# Altium PCB BoosterPack.PcbDoc
Units mil, origin at the board's own origin, x right, y up, seen from the top; angles counter-clockwise.
Board outline 2310.03 x 2910.03 mil, 2 copper layers (Top Layer, Bottom Layer); 12 components, 49 nets, 99 pads, 0 vias.
Unrouted connection lines stored in the file: 43.
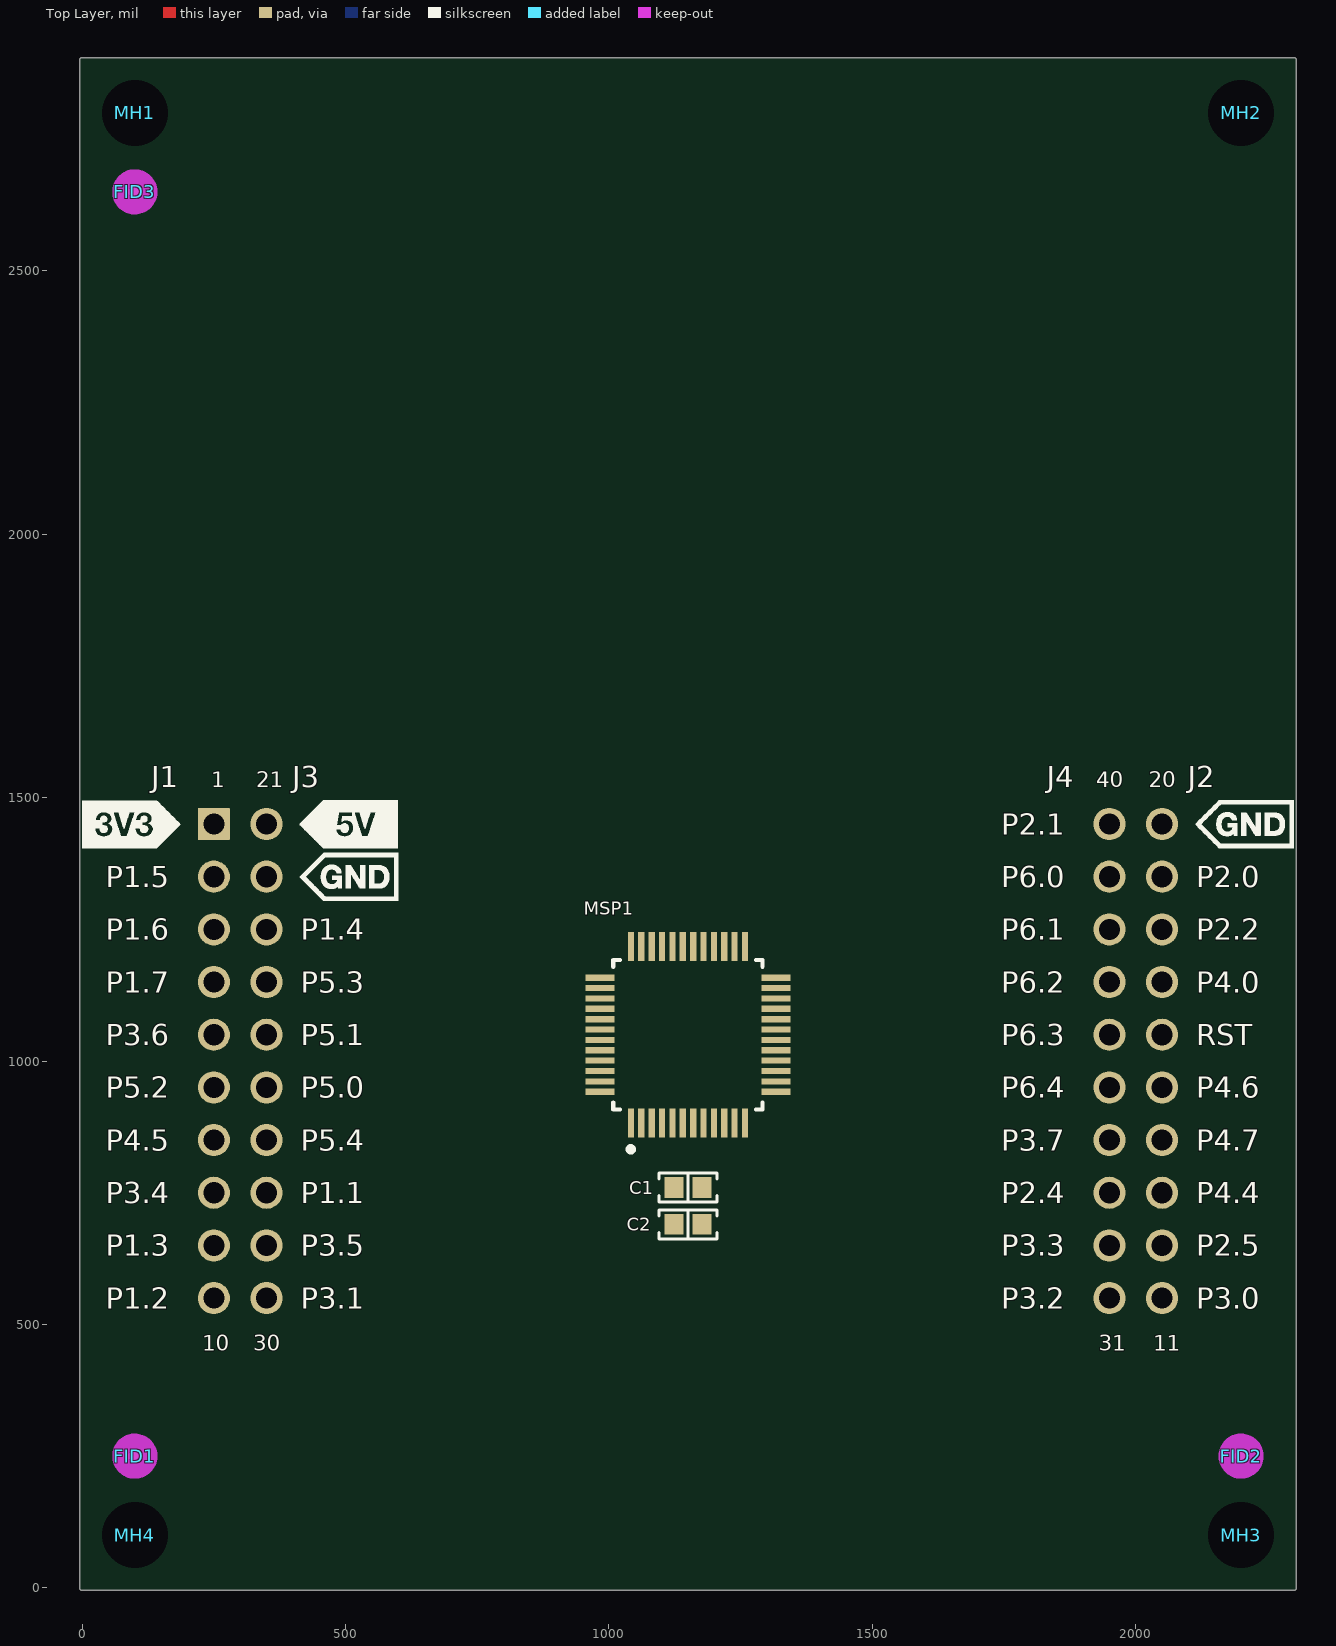
[diagram p0: Top Layer view]
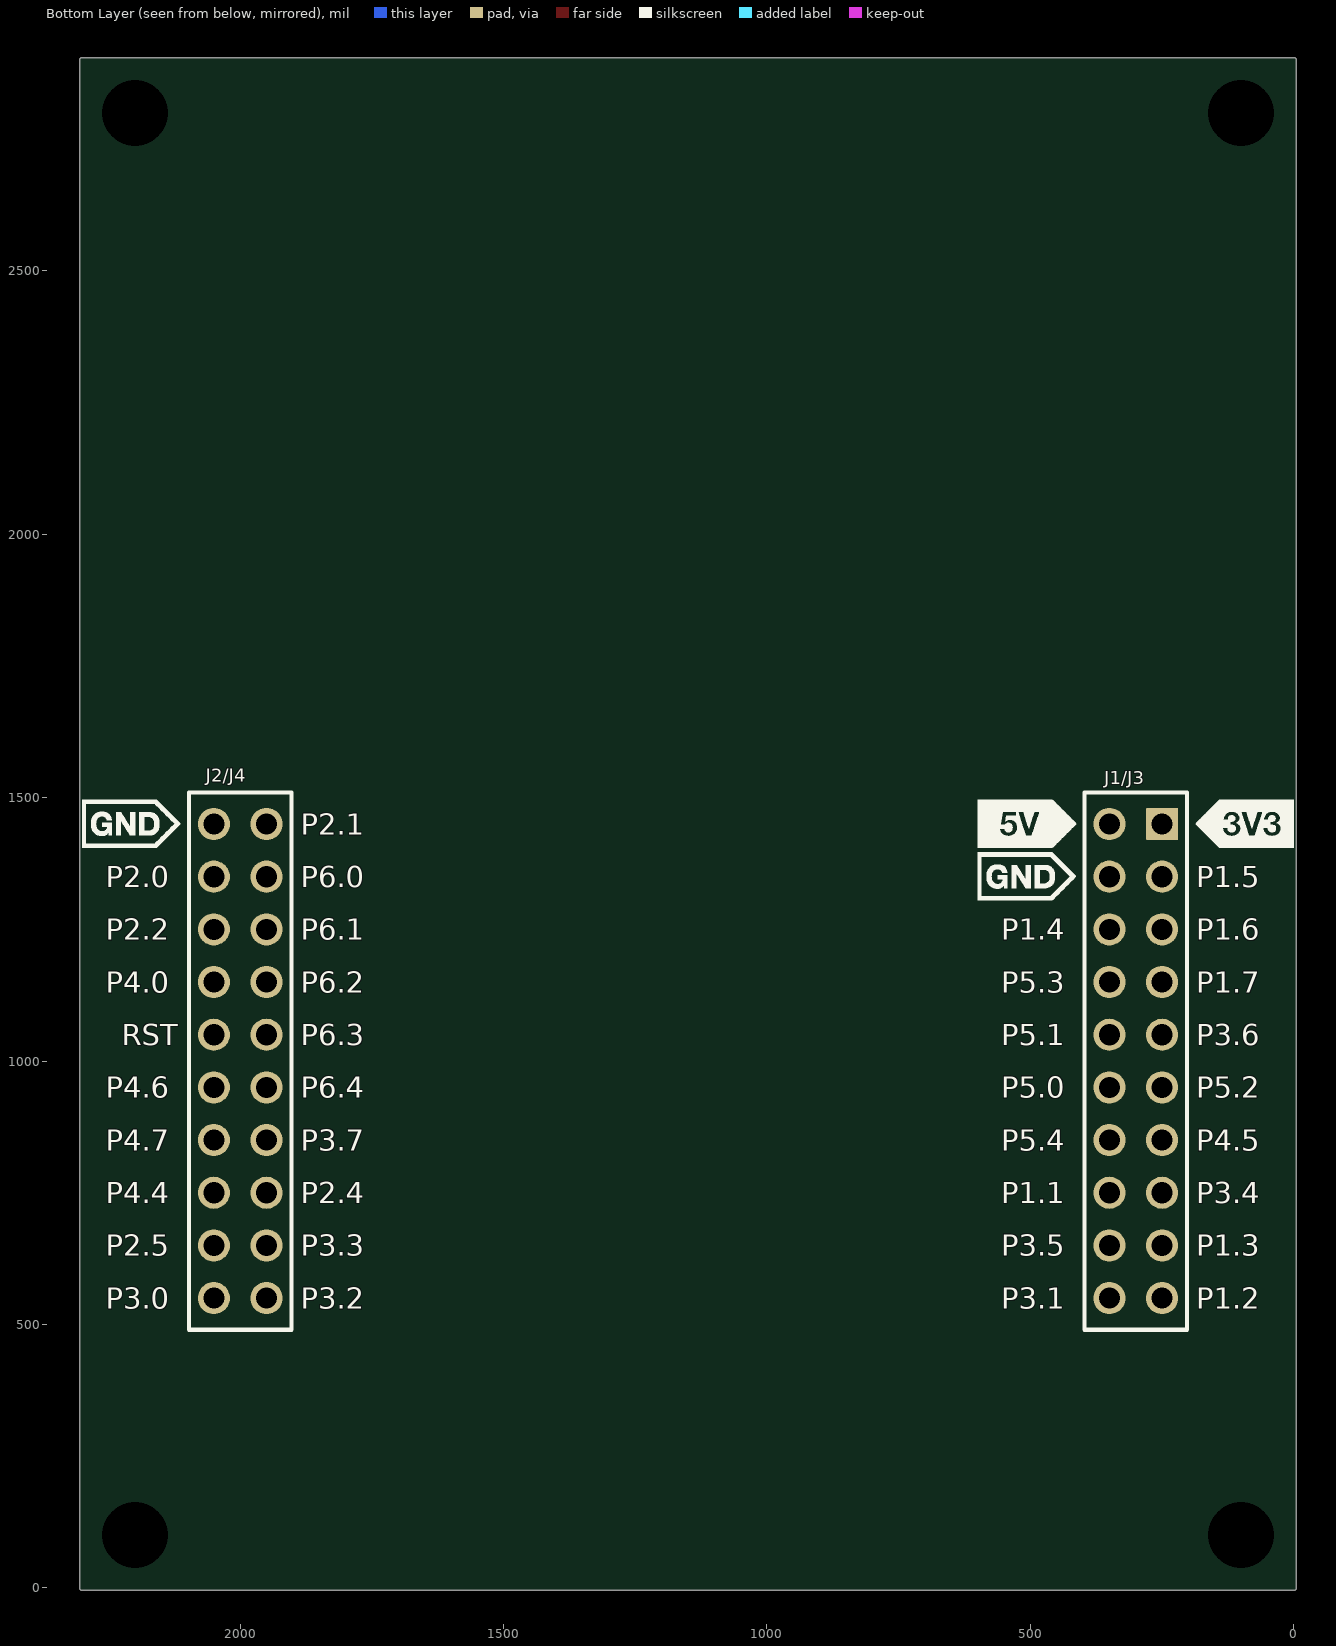
[diagram p1: Bottom Layer view, seen from below]

## Layer stack, top to bottom
Top Solder: solder mask 0.4, Solder Resist, Dk 3.5
Top Layer: signal copper 1.4
Dielectric 1: core 12.6, FR-4, Dk 4.8
Bottom Layer: signal copper 1.4
Bottom Solder: solder mask 0.4, Solder Resist, Dk 3.5

## Board outline
0,-5.01 cw(c0,0) -5.01,0 -5.01,1500 -5.02,1476 -5.01,2900 cw(c0,2900) 0,2905.02 2300,2905.02 cw(c2300,2900) 2305.01,2900 2305.01,1500.03 2305.01,1494.25 2305.01,1500 2305.01,0 cw(c2300,0) 2300,-5.01

## Design rules (kind name [scope] priority, off if disabled: settings)
AcuteAngle [All] p1: minimum=4.50000000000000E+0001 checktracksonly=FALSE
AssemblyTestPointUsage [All] p1: valid=2
BoardOutlineClearance BoardOutlineClearance_MountingHoles [OnCopper and InComponentClass('Mounting Holes')] p1: gap=15 ignorepadtopadclearanceinfootprint=FALSE
BoardOutlineClearance BoardOutlineClearance_Poly [OnCopper and IsPoly] p2: gap=15 ignorepadtopadclearanceinfootprint=FALSE
BoardOutlineClearance [OnCopper and Not InComponentClass('Logo') and not InComponentClass('FiducialMark') and not InRegion(1000,500,4000,800) and not InPoly] p3: gap=10 ignorepadtopadclearanceinfootprint=FALSE
Clearance Clearance_FiducialMark [IsKeepOut and InComponentClass('FiducialMark') vs IsPad and InComponentClass('FiducialMark')] p1: gap=0 ignorepadtopadclearanceinfootprint=FALSE
Clearance "Fiducial Clearance" [InComponentClass('FiducialMark')] p2: gap=10 ignorepadtopadclearanceinfootprint=FALSE except(0: Arc-Hole Track-Hole SMDPad-Hole THPad-Hole Via-Hole Fill-Hole Poly-Hole Region-Hole Text-Hole)
Clearance Clearance_Keepouts [((IsTrack Or IsArc) And Not InPoly) And IsFree and IsKeepOut vs ((IsTrack Or IsArc) And Not InPoly) And IsFree and IsKeepOut] p3: gap=0 ignorepadtopadclearanceinfootprint=FALSE
Clearance Clearance_Poly [InPolygon] p4: gap=12 ignorepadtopadclearanceinfootprint=FALSE except(0: Arc-Hole Track-Hole SMDPad-Hole THPad-Hole Via-Hole Fill-Hole Poly-Hole Region-Hole Text-Hole)
Clearance [All] p5: gap=7.87 ignorepadtopadclearanceinfootprint=FALSE except(0: Arc-Hole Track-Hole SMDPad-Hole THPad-Hole Via-Hole Fill-Hole Poly-Hole Region-Hole Text-Hole)
ComponentClearance ComponentClearance_Standoffs [HasFootprint('KY_MAE-10') vs HasFootprint('NPTH125mil')] p1: gap=0 collisioncheckmode=3 verticalgap=0 showdistances=FALSE
ComponentClearance ComponentClearance_2PinHeaders [HasFootprint('TSW-102-07-G-S') vs HasFootprint('TSW-102-07-G-S')] p2: gap=0 collisioncheckmode=3 verticalgap=0 showdistances=FALSE
ComponentClearance ComponentClearance_TestPoint [HasFootprint('Keystone5001') vs HasFootprint('Keystone5001')] p3: gap=1 collisioncheckmode=3 verticalgap=10 showdistances=FALSE
ComponentClearance ComponentClearance_MountingHoles_FiducialMarks [InComponentClass('Mounting Holes') vs InComponentClass('FiducialMark')] p4: gap=10 collisioncheckmode=3 verticalgap=10 showdistances=FALSE
ComponentClearance ComponentClearance_ShuntToShunt [InComponentClass('Shunt') vs InComponentClass('Shunt')] p5: gap=0 collisioncheckmode=3 verticalgap=0 showdistances=FALSE
ComponentClearance ComponentClearance_Shunt [InComponentClass('Header') vs InComponentClass('Shunt')] p6: gap=0 collisioncheckmode=3 verticalgap=0 showdistances=FALSE
ComponentClearance ComponentClearance_Logo [InComponentClass('Logo')] p7: gap=5 collisioncheckmode=3 verticalgap=10 showdistances=FALSE
ComponentClearance ComponentClearance_ScrewToNut [(HasFootprint('NY PMS 440 0025 PH')) vs (HasFootprint('Keystone_1902C'))] p8: gap=5 collisioncheckmode=3 verticalgap=10 showdistances=FALSE
ComponentClearance ComponentClearance_MountingHoles [InComponentClass('Mounting Holes')] p9: gap=250 collisioncheckmode=3 verticalgap=100000 showdistances=FALSE
ComponentClearance ComponentClearance_SmallPassives [HasFootprint('0201*') or HasFootprint('0402*') or HasFootprint('0508') or HasFootprint('0603*') or HasFootprint('0612') or HasFootprint('0805*') or HasFootprint('0815*') or HasFootprint('0830*') or HasFootprint('1206*') or HasFootprint('1210*') or HasFootprint('1808*') or HasFootprint('1812*') or HasFootprint('1825*') or HasFootprint('2010*') or HasFootprint('2220*') or HasFootprint('2225*') or HasFootprint('2512*') or HasFootprint('2728*') or HasFootprint('3518*') vs HasFootprint('0201*') or HasFootprint('0402*') or HasFootprint('0508') or HasFootprint('0603*') or HasFootprint('0612') or HasFootprint('0805*') or HasFootprint('0815*') or HasFootprint('0830*') or HasFootprint('1206*') or HasFootprint('1210*') or HasFootprint('1808*') or HasFootprint('1812*') or HasFootprint('1825*') or HasFootprint('2010*') or HasFootprint('2220*') or HasFootprint('2225*') or HasFootprint('2512*') or HasFootprint('2728*') or HasFootprint('3518*')] p10: gap=5 collisioncheckmode=3 verticalgap=0 showdistances=FALSE
ComponentClearance ComponentClearance_THtoSMT [IsThruComponent vs IsSMTComponent] p11: gap=10 collisioncheckmode=3 verticalgap=0 showdistances=FALSE
ComponentClearance ComponentClearance_THtoTH [IsThruComponent vs IsThruComponent] p12: gap=15 collisioncheckmode=3 verticalgap=0 showdistances=FALSE
ComponentClearance [All] p13: gap=15 collisioncheckmode=3 verticalgap=0 showdistances=FALSE
DiffPairsRouting [All] p1: maxlimit=100 minlimit=10 mostfreqgap=10 toplayer_minwidth=15 toplayer_maxwidth=15 toplayer_prefwidth=15 bottomlayer_minwidth=15 bottomlayer_maxwidth=15 bottomlayer_prefwidth=15 maxuncoupledlength=1000
FabricationTestPointUsage TestPointUsage [All] p1: valid=2 allowmultiple=FALSE
FabricationTestpoint Testpoint [All] p1: side=3 testpointundercomponent=TRUE minsize=40 maxsize=100 preferedsize=60 minholesize=0 maxholesize=40 preferedholesize=32 testpointgrid=1 allowsidetop=TRUE allowsidebottom=TRUE usegrid=TRUE gridtolerance=0.01
FanoutControl Fanout_LCC [IsLCC] p1: bgadir=Out bgaviamode=Centered fanoutstyle=Auto fanoutdirection=Alternating viagrid=1 // Fanout_LCC (Default Rule)
FanoutControl Fanout_BGA [IsBGA] p2: bgadir=Out bgaviamode=Centered fanoutstyle=Auto fanoutdirection=Alternating viagrid=1 // Fanout_BGA (Default Rule)
FanoutControl Fanout_Default [All] p4: bgadir=Out bgaviamode=Centered fanoutstyle=Auto fanoutdirection=Alternating viagrid=1 // Fanout_Default (Default Rule)
FanoutControl Fanout_Small [(CompPinCount < 5)] p5: bgadir=Out bgaviamode=Centered fanoutstyle=Auto fanoutdirection=OutThenIn viagrid=1 // Fanout_Small (Default Rule)
HoleSize [All] p1: absolutevalues=TRUE maxlimit=251 minlimit=12 maxpercent=80.000 minpercent=20.000
MinimumAnnularRing MinimumAnnularRing_ThermalPadVias [IsVia and InAnyComponent] p1: minimumring=5.91
MinimumAnnularRing [All] p2: minimumring=8
MinimumSolderMaskSliver [All] p1: minsoldermaskwidth=3.94
PlaneClearance [All] p1: clearance=10
PlaneConnect [All] p1: planeconnectstyle=Relief reliefexpansion=10 reliefentries=4 reliefconductorwidth=10 reliefairgap=10
PolygonConnect [All] p1: connectstyle=Direct reliefconductorwidth=10 reliefentries=4 polygonreliefangle="90 Angle" airgapwidth=10
RoomDefinition "MSP430 Main" [InComponentClass('MSP430 Main')] p1: confinementstyle=ConfineIn formatcopy=TRUE lockcomponents=FALSE outline -295,-305 2570,-305 2570,3035 -295,3035
RoutingVias ThermalPadVias [IsVia and InAnyComponent] p1: holewidth=7.87 width=19.68 viastyle="Through Hole" minholewidth=7.87 minwidth=19.68 maxholewidth=16 maxwidth=30
RoutingVias [All] p2: holewidth=12 width=28 viastyle="Through Hole" minholewidth=7.87 minwidth=26 maxholewidth=40 maxwidth=65
SilkToBoardRegionClearance [Not ((IsComment or IsDesignator) And (Hide <> 'False')) and not InRegion(1000,500,4000,800)] p1:
SilkToSilkClearance SilkToSilkClearance_Pb-FreeLogo [(HasFootprint('Pb-Free_Overlay_Medium') OR HasFootprint('Pb-Free_Overlay_Small')) vs (HasFootprint('Pb-Free_Overlay_Medium') OR HasFootprint('Pb-Free_Overlay_Small'))] p1: silktosilkclearance=0
SilkToSilkClearance [All] p2: silktosilkclearance=3
SilkToSolderMaskClearance SilkToComponentPadClearance [(IsPad or IsFill or IsRegion) and InAnycomponent] p1: minsilkscreentomaskgap=3 clearancetoexposedcopper=TRUE
SilkToSolderMaskClearance "Silk to Solder Mask Opening" [All] p2: minsilkscreentomaskgap=3 clearancetoexposedcopper=FALSE
SolderMaskExpansion SolderMaskExpansion_via [isvia] p1: expansion=-17 istentingtop=FALSE
SolderMaskExpansion [All] p2: expansion=1.97 istentingtop=FALSE
Width [All] p1: maxlimit=100 minlimit=6 preferedwidth=10 checkconnectedcopper=TRUE
14 further rules are at their usual default settings.

## Classes and differential pairs
component class FiducialMark: FID1 FID2 FID3

## Components (designator, comment, footprint, x,y, rotation, side; value= is the part's Value field where it differs from the comment)
C1 "100.0 nF" "PCB - CAPACITOR - MLCC - CAP 0603_1608" 1150,760 r180 top locked
C2 "10.0 µF" "PCB - CAPACITOR - MLCC - CAP 0603_1608" 1150,690 r180 top locked
FID1 "Fiducial" Fiducial6.4-20 100,250 r0 top locked
FID2 "Fiducial" Fiducial6.4-20 2200,250 r0 top locked
FID3 "Fiducial" Fiducial6.4-20 100,2650 r0 top
J1/J3 "SSQ-110-03-T-D" BoosterPack_40pin_J1J3 300,1000 r180 bottom locked
J2/J4 "SSQ-110-03-T-D" BoosterPack_40pin_J2J4 2000,1000 r180 bottom locked
MH1 "MTG_NoPads" NPTH125mil 100,2800 r0 top locked
MH2 "MTG_NoPads" NPTH125mil 2200,2800 r0 top locked
MH3 "MTG_NoPads" NPTH125mil 2200,100 r0 top locked
MH4 "MTG_NoPads" NPTH125mil 100,100 r0 top locked
MSP1 "MSP430FR2355TPTR" FP-PT0048A-MFG 1150,1050 r90 top locked

## Footprints (in the part's own frame and the unit in brackets; to place one, negate y for a bottom-side part, rotate by r counter-clockwise, add the part's x,y. Pads: shape width x height; smd on the part's side, far side on the other; paste and mask are expansions set on the pad)
BoosterPack_40pin_J1J3 [mm] "Receptacle, 2.54mm, 10x2, TH"
  rrect6% 1.55x1.55 hole 1.02: 1(1.27,11.43)
  round 1.55 hole 1.02: 2(1.27,8.89) 3(1.27,6.35) 4(1.27,3.81) 5(1.27,1.27) 6(1.27,-1.27) 7(1.27,-3.81) 8(1.27,-6.35) 9(1.27,-8.89) 10(1.27,-11.43) 21(-1.27,11.43) 22(-1.27,8.89) 23(-1.27,6.35) 24(-1.27,3.81) 25(-1.27,1.27) 26(-1.27,-1.27) 27(-1.27,-3.81) 28(-1.27,-6.35) 29(-1.27,-8.89) 30(-1.27,-11.43)
  silkscreen extent -7.62,-12.95 7.62,12.95, body extent -2.48,-12.95 2.48,12.95, height 8.51
BoosterPack_40pin_J2J4 [mm] "Receptacle, 2.54mm, 10x2, TH"
  round 1.55 hole 1.02: 11(-1.27,-11.43) 12(-1.27,-8.89) 13(-1.27,-6.35) 14(-1.27,-3.81) 15(-1.27,-1.27) 16(-1.27,1.27) 17(-1.27,3.81) 18(-1.27,6.35) 19(-1.27,8.89) 20(-1.27,11.43) 31(1.27,-11.43) 32(1.27,-8.89) 33(1.27,-6.35) 34(1.27,-3.81) 35(1.27,-1.27) 36(1.27,1.27) 37(1.27,3.81) 38(1.27,6.35) 39(1.27,8.89) 40(1.27,11.43)
  silkscreen extent -7.62,-12.95 2.48,12.95, body extent -2.48,-12.95 2.48,12.95, height 8.51
Fiducial6.4-20 [mil]
  round 25 smd mask+26.87: 1(0,0)
  Top Layer keep-out circle w46.37: c0,0 r19.68
FP-PT0048A-MFG [mm] "Thin QFP, 48-Leads, Body 7x7mm, Pitch 0.5mm, IPC Medium Density"
  rect 1.4x0.3 smd paste-1000 mask+0: 1(-4.25,2.75) 2(-4.25,2.25) 3(-4.25,1.75) 4(-4.25,1.25) 5(-4.25,0.75) 6(-4.25,0.25) 7(-4.25,-0.25) 8(-4.25,-0.75) 9(-4.25,-1.25) 10(-4.25,-1.75) 11(-4.25,-2.25) 12(-4.25,-2.75) 25(4.25,-2.75) 26(4.25,-2.25) 27(4.25,-1.75) 28(4.25,-1.25) 29(4.25,-0.75) 30(4.25,-0.25) 31(4.25,0.25) 32(4.25,0.75) 33(4.25,1.25) 34(4.25,1.75) 35(4.25,2.25) 36(4.25,2.75)
  rect 0.3x1.4 smd paste-1000 mask+0: 13(-2.75,-4.25) 14(-2.25,-4.25) 15(-1.75,-4.25) 16(-1.25,-4.25) 17(-0.75,-4.25) 18(-0.25,-4.25) 19(0.25,-4.25) 20(0.75,-4.25) 21(1.25,-4.25) 22(1.75,-4.25) 23(2.25,-4.25) 24(2.75,-4.25) 37(2.75,4.25) 38(2.25,4.25) 39(1.75,4.25) 40(1.25,4.25) 41(0.75,4.25) 42(0.25,4.25) 43(-0.25,4.25) 44(-0.75,4.25) 45(-1.25,4.25) 46(-1.75,4.25) 47(-2.25,4.25) 48(-2.75,4.25)
  silkscreen extent -5.65,-3.6 3.6,3.6, body extent -5.05,-5.05 5.05,5.05, height 0.25
NPTH125mil [mil]
  round 120 hole 125 unplated mask+15: 1(0,0)
"PCB - CAPACITOR - MLCC - CAP 0603_1608" [mm] "Chip Capacitor, 2-Leads, Body 1.60x0.80mm, IPC Medium Density"
  rect 0.9x1 smd: 1(-0.675,0) 2(0.675,0)
  silkscreen extent -1.4,-0.7 1.4,0.7, body extent -0.8,-0.41 0.8,0.41, height 0.82

## Part data
C1: library part 1564, "0.1 µF ±5% 50V Ceramic Capacitor X7R 0603 (1608 Metric)", Manufacturer=YAGEO, Manufacturer Part Number=CC0603JRX7R9BB104, Package="0603 (1608 Metric)", Supplier Part Number 1=311-1779-2-ND, Tolerance="5.0 %", Voltage Rating="50.0 V", Capacitance="100.0 nF", Category=Capacitors, Composition=Ceramic, Datasheet=https://www.yageo.com/upload/media/product/productsearch/datasheet/mlcc/UPY-GPHC_X7R_6.3V-to-50V_20.pdf, Name="100.0 nF 50.0 V 5.0 % Ceramic Capacitor", Packaging="Tape & Reel (TR)", Rowan Part Number=1564, Status=Active, Supplier 1=Digi-Key
C2: library part 1572, "10 µF ±20% 16V Ceramic Capacitor X5R 0603 (1608 Metric)", Manufacturer=YAGEO, Manufacturer Part Number=CC0603MRX5R7BB106, Package="0603 (1608 Metric)", Supplier Part Number 1=311-1822-2-ND, Tolerance="20.0 %", Voltage Rating="16.0 V", Capacitance="10.0 µF", Category=Capacitors, Composition=Ceramic, Datasheet=https://www.yageo.com/upload/media/product/productsearch/datasheet/mlcc/UPY-GPHC_X5R_4V-to-50V_26.pdf, Name="10.0 µF 16.0 V 20.0 % Ceramic Capacitor", Packaging="Tape & Reel (TR)", Rowan Part Number=1572, Status=Active, Supplier 1=Digi-Key
FID1 FID2 FID3: "Fiducial mark.  There is nothing to buy or mount.", Manufacturer=N/A, ClassName=FiducialMark, CompType=Fiducial, LatestRevisionDate=2017-05-31, LatestRevisionNote="Added Alternate PartNumber and Alternate Manufacturer parameters to appropriate components.", MountType=N/A, PackageReference=N/A, PartNumber=N/A, Publisher="Texas Instruments", SymbolCreator=codlsc, SymbolVersion=2009-11-4
J1/J3: library part BoosterPack_40pin_J1J3, "Receptacle, 2.54mm, 10x2, Tin, TH", Alternate Manufacturer="Major League Electronics", Alternate PartNumber=CRD-081413-A-G, Manufacturer=Samtec, Supplier Part Number 1=SAM1204-10-ND, ComponentLink1Description="Datasheet Link", CompType=Receptacle, LatestRevisionDate=2017-02-01, MountType=TH, Note="Booster Pack 40 pin J1 and J3", PackageReference="10x2 Receptacle", PartNumber=SSQ-110-03-T-D, Publisher="Texas Instruments", RoHS=Y, Supplier 1=Digi-Key, SymbolCreator=a0412235, SymbolVersion=2015-10-21
J2/J4: library part BoosterPack_40pin_J2J4, "Receptacle, 2.54mm, 10x2, Tin, TH", Alternate Manufacturer="Major League Electronics", Alternate PartNumber=CRD-081413-A-G, Manufacturer=Samtec, Supplier Part Number 1=SAM1204-10-ND, ComponentLink1Description="Datasheet Link", CompType=Receptacle, LatestRevisionDate=2017-02-01, MountType=TH, Note="Booster Pack 40 pin J2 and J4", PackageReference="10x2 Receptacle", PartNumber=SSQ-110-03-T-D, Publisher="Texas Instruments", RoHS=Y, Supplier 1=Digi-Key, SymbolCreator=a0412235, SymbolVersion=2015-10-21
MH1 MH2 MH3 MH4: library part "Mounting Hole (non-standard) No Pad", "PCB Mounting Hole, No Pad", Manufacturer=Any, PartNumber=N/A, CompType="Mounting Hole", LatestRevisionDate=2017-01-25, MountType=N/A, PackageReference="Mounting Hole", Publisher="Texas Instruments", SymbolCreator=a0412235, SymbolVersion=2013-12-26
MSP1: library part CMP-04869-000010-1, "IC MCU 16BIT 32KB FRAM 48LQFP", Ambient Temperature Range High=+105°C, Ambient Temperature Range Low=-40°C, Frequency=24MHz, Manufacturer="Texas Instruments", Max Junction Temp=+115°C, Max Supply Voltage=3.6V, Min Supply Voltage=1.8V, Package=PT0048A, Temperature="-40°C to +105°C", Automotive=No, Category=IC, ComponentLink2Description=Datasheet, ComponentLink2URL=http://www.ti.com/lit/ds/symlink/msp430fr2355.pdf, Core Architecture=RISC, Data Bus Width=16bits, Device Class L1="Integrated Circuits (ICs)", Device Class L2="Embedded Processors and Controllers", Device Class L3=Microcontrollers, Digikey Description="IC MCU 16BIT 32KB FRAM 48LQFP", Footprint Url=http://www.ti.com/lit/ds/symlink/tl16c550c.pdf, Height=1.6mm, Interface=I2C,SPI,UART,USART,SCI,IrDA, Ipc Land Pattern Name=QFP50P900X900X160-48, Lead Free=Yes, Manufacturer Part Number=MSP430FR2355TPTR, Memory Size=32KBytes, Memory Type=OTHER, Number Of A/D Converters=1, Number Of Adc Channels=12, Number Of Cores=1, Number Of I2C Channels=2, Number Of I/Os=44, Number Of Spi Channels=4, Number Of Timers/Counters=4, Number Of Uart Channels=2, Octopart=https://octopart.com/msp430fr2355tptr-texas+instruments-92191342, Ram Size=4KBytes, RoHS=TRUE, Standoff Height=0.05mm, Temperature Range High=+105°C, Temperature Range Low=-40°C

## Nets (pads, with @x,y where several pads share a name; then routed paths per layer and width w, separated by ;. In a path a pad name is that pad's centre, name@x,y a point inside that pad or via, vN(x,y) a via of type N, cw(c..) or ccw(c..) an arc to the next point about the centre after c; other vN are vias at no path point)
+3V3: C1.2 C2.2 J1/J3.1 MSP1.6
+5: J1/J3.21
A0_RX: J1/J3.3 MSP1.32
A0_TX: J1/J3.4 MSP1.31
A1_SEEED: J1/J3.28 MSP1.2
A4_SEEED: J1/J3.23 MSP1.34
A5: J1/J3.2 MSP1.33
A8: J1/J3.26 MSP1.43
A9: J1/J3.25 MSP1.42
A10: J1/J3.6 MSP1.41
A11: J1/J3.24 MSP1.40
B0_SCL: J1/J3.9 MSP1.48
B0_SDA: J1/J3.10 MSP1.1
B1_CLK: J1/J3.7 MSP1.14
B1_CS: J2/J4.13 MSP1.15
B1_MISO: J2/J4.14 MSP1.12
B1_MOSI: J2/J4.15 MSP1.13
BCL_RXD: MSP1.24
BCL_TXD: MSP1.23
GND: C1.1 C2.1 J1/J3.22 J2/J4.20 MSP1.7
OA2+: J2/J4.32 MSP1.44
OA2-: J2/J4.31 MSP1.45
OA2O: J1/J3.30 MSP1.46
OA3O: J1/J3.29 MSP1.37
P1.0: MSP1.3
P2.0: J2/J4.19 MSP1.30
P2.1: J2/J4.40 MSP1.29
P2.2: J2/J4.18 MSP1.28
P2.3: MSP1.27
P2.4: J2/J4.33 MSP1.11
P2.5: J2/J4.12 MSP1.10
P2.6: MSP1.9
P2.7: MSP1.8
P3.0: J2/J4.11 MSP1.47
P3.4: J1/J3.8 MSP1.38
P3.6: J1/J3.5 MSP1.36
P3.7: J2/J4.34 MSP1.35
P4.0: J2/J4.17 MSP1.26
P4.1: MSP1.25
P5.4: J1/J3.27 MSP1.39
P6.0: J2/J4.39 MSP1.22
P6.1: J2/J4.38 MSP1.21
P6.2: J2/J4.37 MSP1.20
P6.3: J2/J4.36 MSP1.19
P6.4: J2/J4.35 MSP1.18
P6.5: MSP1.17
P6.6: MSP1.16
R\S\T\: J2/J4.16 MSP1.5
SBWTCK: MSP1.4
pads on no net: FID1.1 FID2.1 FID3.1 MH1.1 MH2.1 MH3.1 MH4.1

## Silkscreen, mask and mechanical layers (free items; w line width, h text height)
Top Overlay:
  text "P2.1" at 1745,1430 h40
  text "P1.5" at 45,1330 h40
  text "P6.0" at 1745,1330 h40
  text "P2.0" at 2115,1330 h40
  text "P1.6" at 45,1230 h40
  text "P1.4" at 415,1230 h40
  text "P6.1" at 1745,1230 h40
  text "P2.2" at 2115,1230 h40
  text "P1.7" at 45,1130 h40
  text "P5.3" at 415,1130 h40
  text "P6.2" at 1745,1130 h40
  text "P4.0" at 2115,1130 h40
  text "P3.6" at 45,1030 h40
  text "P5.1" at 415,1030 h40
  text "P6.3" at 1745,1030 h40
  text "RST" at 2115,1030 h40
  text "P5.2" at 45,930 h40
  text "P5.0" at 415,930 h40
  text "P6.4" at 1745,930 h40
  text "P4.6" at 2115,930 h40
  text "P4.5" at 45,830 h40
  text "P5.4" at 415,830 h40
  text "P3.7" at 1745,830 h40
  text "P4.7" at 2115,830 h40
  text "P3.4" at 45,730 h40
  text "P1.1" at 415,730 h40
  text "P2.4" at 1745,730 h40
  text "P4.4" at 2115,730 h40
  text "P1.3" at 45,630 h40
  text "P3.5" at 415,630 h40
  text "P3.3" at 1745,630 h40
  text "P2.5" at 2115,630 h40
  text "P1.2" at 45,530 h40
  text "P3.1" at 415,530 h40
  text "P3.2" at 1745,530 h40
  text "P3.0" at 2115,530 h40
Bottom Overlay:
  text "P2.1" at 1885,1430 h40
  text "P1.5" at 185,1330 h40
  text "P6.0" at 1885,1330 h40
  text "P2.0" at 2255,1330 h40
  text "P1.6" at 185,1230 h40
  text "P1.4" at 555,1230 h40
  text "P6.1" at 1885,1230 h40
  text "P2.2" at 2255,1230 h40
  text "P1.7" at 185,1130 h40
  text "P5.3" at 555,1130 h40
  text "P6.2" at 1885,1130 h40
  text "P4.0" at 2255,1130 h40
  text "P3.6" at 185,1030 h40
  text "P5.1" at 555,1030 h40
  text "P6.3" at 1885,1030 h40
  text "RST" at 2225,1030 h40
  text "P5.2" at 185,930 h40
  text "P5.0" at 555,930 h40
  text "P6.4" at 1885,930 h40
  text "P4.6" at 2255,930 h40
  text "P4.5" at 185,830 h40
  text "P5.4" at 555,830 h40
  text "P3.7" at 1885,830 h40
  text "P4.7" at 2255,830 h40
  text "P3.4" at 185,730 h40
  text "P1.1" at 555,730 h40
  text "P2.4" at 1885,730 h40
  text "P4.4" at 2255,730 h40
  text "P1.3" at 185,630 h40
  text "P3.5" at 555,630 h40
  text "P3.3" at 1885,630 h40
  text "P2.5" at 2255,630 h40
  text "P1.2" at 185,530 h40
  text "P3.1" at 555,530 h40
  text "P3.2" at 1885,530 h40
  text "P3.0" at 2255,530 h40
M1 Board Outline:
  lines w10: 0,0 0,2900 2300,2900 2300,0 0,0
M9 Title Sheet:
  lines w10: -541.5,-358.5 -341.5,-358.5 ; -541.5,2016.5 -341.5,2016.5 ; -541.5,4391.5 -341.5,4391.5 ; 1958.5,-2733.5 1958.5,-2533.5 ; 1958.5,6566.5 1958.5,6766.5 ; 4458.5,-2733.5 4458.5,-2533.5 ; 4458.5,6566.5 4458.5,6766.5 ; 6958.5,-2733.5 6958.5,-2533.5 ; 6958.5,6566.5 6958.5,6766.5 ; 9458.5,-2733.5 9458.5,-2533.5 ; 9458.5,6566.5 9458.5,6766.5 ; 11253.5,-2533.5 11253.5,-1923.5 ; 11253.5,-2223.5 14253.5,-2223.5 ; 11253.5,-1623.5 14253.5,-1623.5 ; 11253.5,-1029.5 11253.5,-1323.5 ; 11254.5,-1029.5 14254.5,-1029.5 ; 11958.5,-2733.5 11958.5,-2533.5 ; 11958.5,6566.5 11958.5,6766.5 ; 12758.5,-2523.5 12758.5,-1923.5 ; 14253.5,-1923.5 11253.5,-1923.5 ; 14253.5,-1323.5 11253.5,-1323.5 ; 14258.5,-1333.5 14258.5,-2533.5 ; 14258.5,-358.5 14458.5,-358.5 ; 14258.5,2016.5 14458.5,2016.5 ; 14258.5,4391.5 14458.5,4391.5 ; 11253.5,-1923.5 11253.5,-1323.5 ; 14258.5,-2533.5 -341.5,-2533.5 -341.5,6566.5 14258.5,6566.5 14258.5,-2533.5 ; -541.5,-2733.5 14458.5,-2733.5 14458.5,6766.5 -541.5,6766.5 -541.5,-2733.5
  text "1" at 689.84,6636.5 h70
  text "2" at 3185.5,6636.5 h70
  text "3" at 5674.84,6636.5 h70
  text "4" at 8181.51,6636.5 h70
  text "5" at 10680.5,6636.5 h70
  text "6" at 13185.5,6636.5 h70
  text "A" at -466.5,5493.5 h70
  text "A" at 14333.5,5493.5 h70
  text "B" at -466.5,3113.5 h70
  text "B" at 14333.5,3113.5 h70
  text "C" at -466.5,738.5 h70
  text "C" at 14333.5,738.5 h70
  text "PROJECT TITLE:" at 11293.5,-1122.5 h45
  text "TITLE HERE" at 11343.5,-1255.83 h70
  text "ROWAN USERNAME:" at 11293.5,-1423.5 h45
  text "USERNAME HERE" at 11343.5,-1563.5 h70
  text "D" at -466.5,-1631.5 h70
  text "D" at 14333.5,-1631.5 h70
  text "FILE NAME:" at 11293.5,-1723.5 h45
  text ".PCB_File_Name_No_Path" at 11343.5,-1843.5 h70
  text "ENGINEER:" at 11293.5,-2013.5 h45
  text "REVISION:" at 12798.5,-2013.5 h45
  text "Logan Greif" at 11343.5,-2168.49 h70
  text ".VersionControl_RevNumberShort" at 12849,-2168.49 h70
  text "ALTIUM DESIGNER VERSION:" at 12798.5,-2323.5 h45
  text ".print_Scale" at 11343.5,-2456.83 h70
  text ".Application_BuildNumber" at 12849,-2456.83 h70
  text "1" at 689.84,-2663.5 h70
  text "2" at 3185.5,-2663.5 h70
  text "3" at 5674.84,-2663.5 h70
  text "4" at 8181.51,-2663.5 h70
  text "5" at 10680.5,-2663.5 h70
  text "6" at 13185.5,-2663.5 h70
M12 Stackup:
  drawing of 191 lines, arcs and shapes, not listed
  text "Layer" at 6092.5,4112.5 h60
  text "Name" at 6502.41,4112.5 h60
  text "Material" at 7432.16,4112.5 h60
  text "Thickness" at 8291.92,4112.5 h60
  text "Constant" at 8941.76,4112.5 h60
  text "Board Layer Stack" at 9511.62,4112.5 h60
  text "Top Overlay" at 6502.41,3992.5 h60
  text "Top Solder" at 6502.41,3872.5 h60
  text "Solder Resist" at 7432.16,3872.5 h60
  text "0.40mil" at 8291.92,3872.5 h60
  text "3.5" at 8941.76,3872.5 h60
  text "1" at 6092.5,3752.5 h60
  text "Top Layer" at 6502.41,3752.5 h60
  text "1.40mil" at 8291.92,3752.5 h60
  text "Dielectric 1" at 6502.41,3632.5 h60
  text "FR-4" at 7432.16,3632.5 h60
  text "12.60mil" at 8291.92,3632.5 h60
  text "4.8" at 8941.76,3632.5 h60
  text "2" at 6092.5,3512.5 h60
  text "Bottom Layer" at 6502.41,3512.5 h60
  text "1.40mil" at 8291.92,3512.5 h60
  text "Bottom Solder" at 6502.41,3392.5 h60
  text "Solder Resist" at 7432.16,3392.5 h60
  text "0.40mil" at 8291.92,3392.5 h60
  text "3.5" at 8941.76,3392.5 h60
  text "Bottom Overlay" at 6502.41,3272.5 h60
Drill Drawing:
  lines w10: 6076.09,2392.17 6089.9,2392.17 6103.71,2378.36 6117.52,2392.17 6131.34,2392.17 6117.52,2405.98 6131.34,2419.79 6117.52,2419.79 6103.71,2433.61 6089.9,2419.79 6076.09,2419.79 6089.9,2405.98 6076.09,2392.17 ; 6076.09,2516.48 6089.9,2516.48 6089.9,2502.67 6117.52,2502.67 6117.52,2516.48 6131.34,2516.48 6131.34,2544.11 6117.52,2544.11 6117.52,2557.92 6089.9,2557.92 6089.9,2544.11 6076.09,2544.11 6076.09,2516.48 ; 6087.14,2397.69 6095.42,2397.69 6103.71,2389.41 6112,2397.69 6120.29,2397.69 6112,2405.98 6120.29,2414.27 6112,2414.27 6103.71,2422.56 6095.42,2414.27 6087.14,2414.27 6095.42,2405.98 6087.14,2397.69
  lines w12: 6026,2341.06 9695.84,2341.06 ; 6026,2589.69 9695.84,2589.69 ; 6363.83,2216.75 6363.83,2714 ; 6695.95,2216.75 6695.95,2714 ; 7332.59,2216.75 7332.59,2714 ; 7591.72,2216.75 7591.72,2714 ; 7966.95,2216.75 7966.95,2714 ; 8691.45,2216.75 8691.45,2714 ; 9220.67,2216.75 9220.67,2714 ; 6026,2216.75 9695.84,2216.75 9695.84,2714 6026,2714 6026,2216.75
  text "Symbol" at 6100.59,2626.98 h72
  text "Quantity" at 6401.12,2626.98 h72
  text "Finished Hole Size" at 6733.24,2626.98 h72
  text "Plated" at 7369.88,2626.98 h72
  text "Hole Type" at 7629.01,2626.98 h72
  text "Drill Layer Pair" at 8004.24,2626.98 h72
  text "Hole Tolerance" at 8728.74,2626.98 h72
  text "Hole Length" at 9257.97,2626.98 h72
  text "4" at 6401.12,2502.67 h60
  text "125.00mil (3.175mm)" at 6733.24,2502.67 h60
  text "NPTH" at 7369.88,2502.67 h60
  text "Round" at 7629.01,2502.67 h60
  text "Top Layer - Bottom Layer" at 8004.24,2502.67 h60
  text "-" at 9257.97,2502.67 h60
  text "40" at 6401.12,2378.36 h60
  text "40.16mil (1.020mm)" at 6733.24,2378.36 h60
  text "PTH" at 7369.88,2378.36 h60
  text "Round" at 7629.01,2378.36 h60
  text "Top Layer - Bottom Layer" at 8004.24,2378.36 h60
  text "-" at 9257.97,2378.36 h60
  text "44 Total" at 6401.12,2254.04 h60
M17 Embedded Cavity:
  text ".Layer_Name" at 527,-2258.49 h60
M18 Embedded Assembly:
  text ".Layer_Name" at 527,-2258.49 h60
M19 Embedded Keepout:
  text ".Layer_Name" at 527,-2258.49 h60

## Dimensions
0,0 to 0,2900 on M2 Board Dimensions
0,0 to 2300,0 on M2 Board Dimensions

## Text inside footprints (layer, text, board x,y; h text height)
J1/J3: Top Overlay "21" at 330,1520 h30; Top Overlay "30" at 325,450 h30; Top Overlay "1" at 245,1520 h30; Top Overlay "10" at 228,450 h30; Top Overlay "J3" at 398.43,1520 h40; Top Overlay "J1" at 131.02,1520 h40
J2/J4: Top Overlay "40" at 1925,1520 h30; Top Overlay "31" at 1930,450 h30; Top Overlay "11" at 2033,450 h30; Top Overlay "20" at 2025,1520 h30; Top Overlay "J2" at 2098.43,1520 h40; Top Overlay "J4" at 1831.02,1520 h40